# Altium PCB projct_PCB.PcbDoc
Units mil, origin at the board's own origin, x right, y up, seen from the top; angles counter-clockwise.
Board outline 2215 x 905 mil, 2 copper layers (Top Layer, Bottom Layer); 33 components, 49 nets, 162 pads, 55 vias.
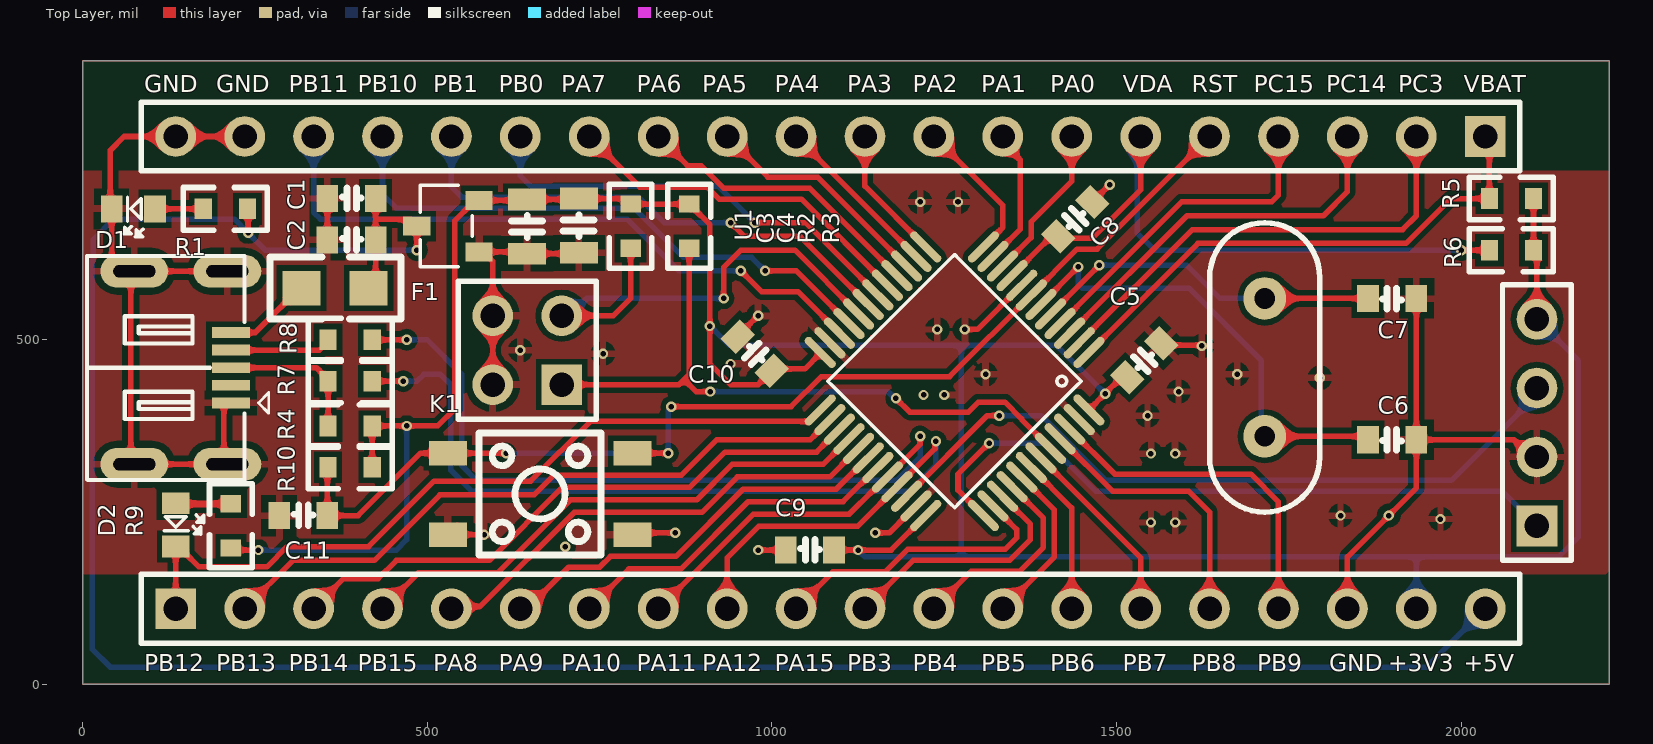
[diagram p0: Top Layer view]
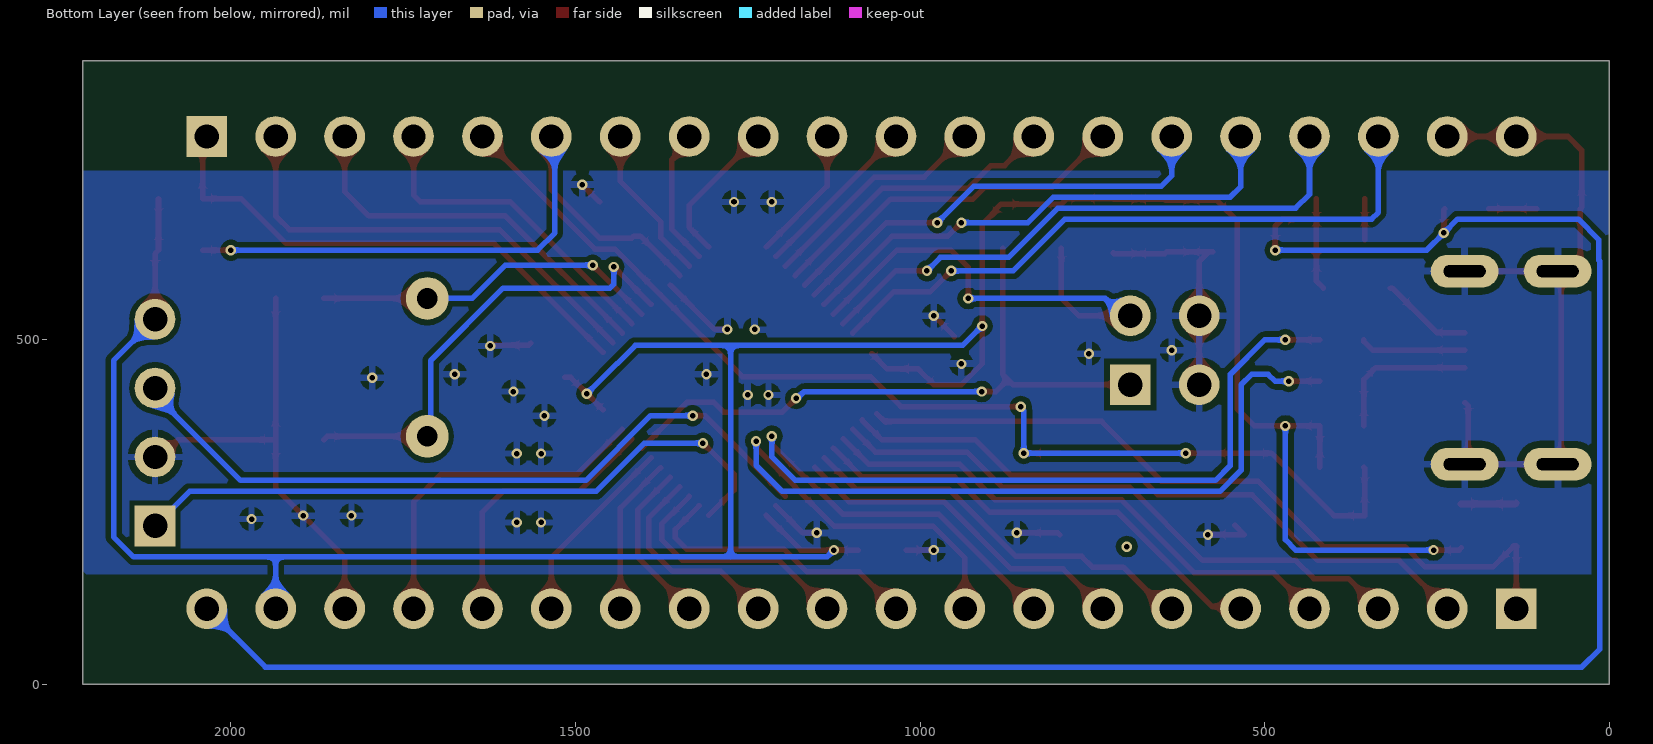
[diagram p1: Bottom Layer view, seen from below]

## Layer stack, top to bottom
Top Solder: solder mask 0.4, Solder Resist, Dk 3.5
Top Layer: signal copper 1.4
Dielectric 1: dielectric 12.6, FR-4, Dk 4.8
Bottom Layer: signal copper 1.4
Bottom Solder: solder mask 0.4, Solder Resist, Dk 3.5

## Board outline
0,0 0,905 2215,905 2215,0

## Design rules (kind name [scope] priority, off if disabled: settings)
Clearance [All] p1: gap=8 ignorepadtopadclearanceinfootprint=FALSE
PolygonConnect [All] p1: connectstyle=Relief reliefconductorwidth=10 reliefentries=4 polygonreliefangle="90 Angle" airgapwidth=10
RoutingVias [All] p1: holewidth=28 width=50 viastyle="Through Hole" minholewidth=28 minwidth=50 maxholewidth=28 maxwidth=50
SolderMaskExpansion [All] p1: expansion=4 istentingtop=FALSE
Width [All] p1: maxlimit=10 minlimit=8 preferedwidth=8 minimp=50.000000 maximp=50.000000 favimp=50.000000
30 further rules are at their usual default settings.

## Classes and differential pairs
component class project_Sheet: C1 C2 C3 C4 C5 C6 C7 C8 C9 C10 C11 D2 F1 K1 R1 R2 R3 R4 R6 R8 R10

## Components (designator, comment, footprint, x,y, rotation, side; value= is the part's Value field where it differs from the comment)
C1 "4.7uF/10V" 0603CC 355,705 r0 top
C2 "100nF/50V" 0603CC 355,645 r0 top
C3 "4.7uF/50V" 0805CC 645,625 r90 top
C4 "100nF/50V" 0805CC 720,626.26 r90 top
C5 "100nF/50V" 0603CC 1565,495 r225 top
C6 "22pF/10V" 0603CC 1935,355 r180 top
C7 "22pF/10V" 0603CC 1935,560 r180 top
C8 "100nF/50V" 0603CC 1465,700 r225 top
C9 "100nF/50V" 0603CC 1020,195 r0 top
C10 "100nF/50V" 0603CC 950.5,504.5 r315 top
C11 "100nF/50V" 0603CC 285,245 r0 top
CY1 "8MHz" HC-49S 1715,560 r270 top
D1 "LED" 0603LED 105,690 r180 top
D2 "LED" 0603LED 135,262.99 r270 top
F1 "100mA" R0805 317.48,575.03 r0 top
J1 "Header 2x2" HDR2X2 695,435 r90 top
J2 "Header 1x7" PCBComponent_1 425,63.5 r270 top
J3 "Header 1x20" HDR1X20 2035,795 r180 top
J4 "Header 1x20" HDR1X20 135,110 r0 top
J5 "Header 1x4" HDR1X4 2110,230 r90 top
K1 "SW4P" 4.5*4.5*3.8 665,275 r180 top
R1 "1K5" 0603R#1 207,690 r0 top
R2 "1K5" 0603R#1 795,665 r90 top
R3 "1K5" 0603R#1 880,665 r90 top
R4 "1K5" 0603R#1 388,375 r0 top
R5 "Comment" 0603R#2 2073,705 r0 top
R6 "0R" 0603R#1 2073,630 r180 top
R7 "10R" 0603R#1 388,440 r180 top
R8 "10R" 0603R#1 388,500 r180 top
R9 "1K5" 0603R#1 215,230 r270 top
R10 "10K" 0603R#1 388,315 r0 top
U1 "SS662K-3.3V" SOT23-JX 530,665 r90 top
U2 "STM32F103C8T6" LQFP48 1265,440 r135 top

## Footprints (in the part's own frame and the unit in brackets; to place one, negate y for a bottom-side part, rotate by r counter-clockwise, add the part's x,y. Pads: shape width x height; smd on the part's side, far side on the other; paste and mask are expansions set on the pad)
4.5*4.5*3.8 [mm]
  rect 1.4x0.9 smd: 1(-3.364,1.464) 1(3.436,1.464) 2(-3.364,-1.536) 2(3.436,-1.536)
  silkscreen extent -2.21,-2.29 2.29,2.21
0603CC [mm]
  rect 0.8x1 smd: 1(0,0) 2(1.778,0)
  silkscreen extent 0.55,-0.38 1.25,0.39
0603LED [mm]
  rect 0.8x1 smd: 1(0,0) 2(1.6,0)
  silkscreen extent 0.42,-0.43 1.15,1.02
0603R#1 [mil]
  rect 25x30 smd: 1(-32,0) 2(32,0)
  silkscreen extent -61,-31 61,31
0603R#2 [mil]
  rect 25x30 smd: 2(32,0) ""(-32,0)
  silkscreen extent -61,-31 61,31
0805CC [mm]
  rect 0.8x1.4 smd: 1(0,0) 2(2,0)
  silkscreen extent 0.6,-0.56 1.4,0.58
HC-49S [mil]
  round 62 hole 30: 1(0,0) 2(200,0)
  silkscreen extent -110,-80 310,80
HDR1X4 [mm] "Connector; Header; 4 Position"
  rect 1.5x1.5 hole 0.9: 1(0,0)
  round 1.5 hole 0.9: 2(2.54,0) 3(5.08,0) 4(7.62,0)
  silkscreen extent -1.27,-1.27 8.89,1.27
HDR1X20 [mm] "Connector; Header; 20 Position"
  rect 1.5x1.5 hole 0.9: 1(0,0)
  round 1.5 hole 0.9: 2(2.54,0) 3(5.08,0) 4(7.62,0) 5(10.16,0) 6(12.7,0) 7(15.24,0) 8(17.78,0) 9(20.32,0) 10(22.86,0) 11(25.4,0) 12(27.94,0) 13(30.48,0) 14(33.02,0) 15(35.56,0) 16(38.1,0) 17(40.64,0) 18(43.18,0) 19(45.72,0) 20(48.26,0)
  silkscreen extent -1.27,-1.27 49.53,1.27
HDR2X2 [mm] "Connector; Header; 2x2 Position"
  rect 1.5x1.5 hole 0.9: 1(0,0)
  round 1.5 hole 0.9: 2(0,2.54) 3(2.54,0) 4(2.54,2.54)
  silkscreen extent -1.27,-1.27 3.81,3.81
LQFP48 [mm]
  oval 0.3x1.5 smd: 1(-2.75,-4.25) 2(-2.25,-4.25) 3(-1.75,-4.25) 4(-1.25,-4.25) 5(-0.75,-4.25) 6(-0.25,-4.25) 7(0.25,-4.25) 8(0.75,-4.25) 9(1.25,-4.25) 10(1.75,-4.25) 11(2.25,-4.25) 12(2.75,-4.25) 25(2.75,4.25) 26(2.25,4.25) 27(1.75,4.25) 28(1.25,4.25) 29(0.75,4.25) 30(0.25,4.25) 31(-0.25,4.25) 32(-0.75,4.25) 33(-1.25,4.25) 34(-1.75,4.25) 35(-2.25,4.25) 36(-2.75,4.25)
  oval 1.5x0.3 smd: 13(4.25,-2.75) 14(4.25,-2.25) 15(4.25,-1.75) 16(4.25,-1.25) 17(4.25,-0.75) 18(4.25,-0.25) 19(4.25,0.25) 20(4.25,0.75) 21(4.25,1.25) 22(4.25,1.75) 23(4.25,2.25) 24(4.25,2.75) 37(-4.25,2.75) 38(-4.25,2.25) 39(-4.25,1.75) 40(-4.25,1.25) 41(-4.25,0.75) 42(-4.25,0.25) 43(-4.25,-0.25) 44(-4.25,-0.75) 45(-4.25,-1.25) 46(-4.25,-1.75) 47(-4.25,-2.25) 48(-4.25,-2.75)
  silkscreen extent -3.3,-3.3 3.3,3.3
PCBComponent_1 [mm]
  rect 0.4x1.4 smd: 1(-11.354,-5.334) 2(-10.706,-5.334) 3(-10.058,-5.334) 4(-9.411,-5.334) 5(-8.763,-5.334)
  oval 1.2x2.5 hole 0.45 slot 1.55 at 90 deg: 5(-13.614,-5.461) 5(-13.614,-8.89) 5(-6.502,-5.461) 5(-6.502,-8.89)
  silkscreen extent -14.17,-10.63 -5.92,-3.94, body extent -14.06,-10.51 -6.06,-4.91, height 2.8
R0805 [mm] "1/8W"
  rect 1.4x1.27 smd: 1(0,0) 2(2.477,-0.001)
  silkscreen extent -1.15,-1.14 3.67,1.14, body extent 0.04,-0.62 2.04,0.64, height 0.55
SOT23-JX [mm]
  rect 0.7x1 smd: 1(-0.95,-1.15) 2(0.95,-1.15) 3(0,1.15)
  silkscreen extent -1.5,-0.89 1.5,1.02

## Part data
C1 C2 C3 C4 C5 C6 C7 C8 C9 C10 C11: library part CAP
CY1: library part CY2P, "2pin晶振", BOM_Supplier=LCSC, catid=20, spicePre=Y
F1: library part FUSE, "保险丝"
J1: library part Header2*2, "双排连接器"
J2 J3 J4 J5: "单排连接器"
K1: "4Pin轻触按键"
R1 R2 R3 R4 R6 R7 R8 R9 R10: library part RES, "分立电阻"
U1: library part SS662K
U2: "STM32单片机"

## Via types
v1: diameter 15, hole 8, Top Layer to Bottom Layer, tented both sides, 54 vias
v2: diameter 15, hole 8, Top Layer to Bottom Layer, 1 vias

## Nets (pads, with @x,y where several pads share a name; then routed paths per layer and width w, separated by ;. In a path a pad name is that pad's centre, name@x,y a point inside that pad or via, vN(x,y) a via of type N, cw(c..) or ccw(c..) an arc to the next point about the centre after c; other vN are vias at no path point)
+3V3: C3.2 C4.2 C5.2 C9.2 C10.2 J4.19 J5.4 R2.2 R3.2 R4.2 R5.2 R6.1 R9.2 R10.2 U1.2 U2.24 U2.36 U2.48 | length 4488.6
  Top Layer w8: R9.2 218,195 v2(255,195) ; R10.2 R4.2 v1(470,375) 515,375 540,400 540,673.03 569.37,702.4 U1.2 643.66,702.4 C3.2 718.74,703.74 C4.2 787,705 R2.2 R3.2 882.5,697 891,688.5 891,686 910,667 v1(910,520) 910,465 940,435 980,435 C10.2 1002.78,457.78 1047.78,457.78 U2.24@1070,480 ; C9.2 v1(1125,195) 1173.11,195 U2.36 ; U2.48 v1(1483.5,421.87) 1507.13,445.5 C5.2 ; R5.2 R6.1 2110,625 J5.4
  Bottom Layer w8: v2(255,195) 455,195 470,210 v1(470,375) ; v1(910,520) 938.17,491.83 1275,491.83 ; v1(1125,195) 1135,185 1275,185 ; v1(1483.5,421.87) 1440.37,465 1440,465 1413.17,491.83 1275,491.83 ; J4.19 1935,185 ; J5.4 2170,470 2170,213.97 2141.03,185 1935,185 ; 1275,185 1935,185 ; 1275,185 1275,491.83
+5V: C1.2 C2.2 F1.2 J4.20 R1.2 U1.3 | length 3431
  Top Layer w8: R1.2 240,689 v1(240,655) ; F1.2 425,585 C2.2 425,675 ; C1.2 425,675 ; v1@485,630 v1(484.86,630.14) 484.72,630.28 U1.3 474.94,674.78 425.22,674.78 425,675
  Bottom Layer w8: v1(484.86,630.14) 264.86,630.14 v1(240,655) 220,675 45,675 15,645 15,615.47 13.79,614.26 13.79,51.21 40,25 1950,25 J4.20
BOOT0: J1.1 R3.1 U2.44 | length 959.8
  Top Layer w8: J1.1 865,435 872.5,442.5 ; R3.1 880,450 872.5,442.5 ; v1(910.5,425) 890,425 872.5,442.5 ; v1(1180,415) 1200,395 1285,395 1299.5,409.5 1338.08,409.5 1362.16,385.42 1362.16,384.6 U2.44
  Bottom Layer w8: v1(910.5,425) 1168.11,425 1178.11,415 v1(1180,415)
BOOT1: J1.3 R2.1 U2.20 | length 718.2
  Top Layer w8: J1.3 770,535 795,560 R2.1 ; v1(930,560) 930,605 955,630 1033.24,630 U2.20
  Bottom Layer w8: J1.3 706.41,535 731.41,560 v1(930,560)
GND: C1.1 C2.1 C3.1 C4.1 C5.1 C6.1 C7.1 C8.1 C9.1 C10.1 C11.1 D1.2 J1.2 J1.4 J2.5 J3.19 J3.20 J4.18 J5.2 K1.1 U1.1 U2.8 U2.23 U2.35 U2.47 | length 2620.5
  Top Layer w8: J2.5@205,599.5 75,599.5 J2.5@70,599.5 ; J2.5@210,408.5 208.87,408.5 205,404.63 205,319.5 75,319.5 70,319.5 J2.5@70,599.5 ; J3.19 J3.20 60,795 40,775 40,692.01 D1.2 42.01,617.63 60.14,599.5 J2.5@70,599.5 ; C2.1 C1.1 ; K1.1@543.44,231.08 529.72,217.36 v1(582.36,217.36) ; U1.1 U1.1@581.18,627.6 ; J1.2 J1.4 595,613.78 U1.1@581.18,627.6 ; C4.1 718.74,625 C3.1 642.4,627.6 U1.1@581.18,627.6 ; K1.1@797.44,217.36 800.08,220 v1(860,220) ; C10.1 950.5,505.5 v1(980,535) ; v1(980,195) C9.1 ; v1(1150,220) 1170.27,220 U2.35 ; v1(1280,515) 1298.24,515 U2.8 ; C8.1 v1(1490,725) ; C5.1 1567.78,492.22 1622.78,492.22 v1@1625,490 ; J4.18 1835,185 1935,285 C6.1 ; C7.1 C6.1 ; J5.2 2101.27,330 2076.27,355 C6.1
  other v1: 1550,235 1585,235 1970,240 1825,245 1895,245 1550,335 1585,335 1545,390 1220,420 1250,420 1590,425 1795,445 1310,450 1675,450 940,465 755,480 635,485 1623.89,491.11 1240,515 1215,700 1270,700
NetD1_1: D1.1 R1.1 | length 70
  Top Layer w8: D1.1 R1.1
NetD2_1: D2.1 R9.1 | length 80.4
  Top Layer w10: D2.1 135.99,262 R9.1
NetF1_1: F1.1 J2.1 | length 134.2
  Top Layer w8: J2.1@210,510.5 250.39,510.5 314.92,575.03 F1.1
NRST: C11.2 J3.5 K1.2 R10.1 U2.7 | length 1668.7
  Top Layer w8: R10.1 355,314 C11.2 399.69,245 490.17,335.47 529.72,335.47 v1(614.53,335.47) v1@615,335 ; K1.2@797.44,335.47 v1(849.53,335.47) v1@850,335 ; v1(853.88,403.02) 1028.02,403.02 1071.7,446.7 1257.78,446.7 U2.7 1442.78,631.7 1471.7,631.7 J3.5
  Bottom Layer w8: v1(614.53,335.47) v1(849.53,335.47) 849.53,396.78 853.88,401.12 v1(853.88,403.02)
"OSC   OUT": C6.2 CY1.2 U2.6 | length 677.4
  Top Layer w8: U2.6 1390.27,551.49 1444.33,605.54 v1(1444.33,605.67) ; CY1.2 1860,360 C6.2
  Bottom Layer w8: v1(1444.33,605.67) 1444.33,580.67 1450,575 1605,575 1710,470 1710,365 CY1.2
"OSC IN": C7.2 CY1.1 U2.5 | length 511.9
  Top Layer w8: U2.5 v1(1475,608.24) v1@1475,610 ; CY1.1 C7.2
  Bottom Layer w8: v1(1475,608.24) 1601.76,608.24 1650,560 CY1.1
PA0: J3.7 U2.10 | length 229.6
  Top Layer w8: U2.10 1376,648.44 1376,671 1435,730 J3.7
PA1: J3.8 U2.11 | length 200.7
  Top Layer w8: U2.11 1360,660.27 1360,761.27 1335,786.27 J3.8
PA2: J3.9 U2.12 | length 213.2
  Top Layer w8: J3.9 1335,695 1335,663.11 U2.12
PA3: J3.10 U2.13 | length 196.7
  Top Layer w8: J3.10 1135,723.11 U2.13
PA4: J3.11 U2.14 | length 246.4
  Top Layer w8: J3.11 1035.14,795 1209.18,620.95 U2.14
PA5: J3.12 U2.15 | length 338.3
  Top Layer w8: J3.12 994,736 1066.44,736 U2.15
PA6: J3.13 U2.16 | length 430.1
  Top Layer w8: J3.13 877.38,752.62 897.38,752.62 930,720 1054.6,720 U2.16
PA7: J3.14 U2.17 | length 522
  Top Layer w8: J3.14 808.5,721.5 905.87,721.5 923.37,704 1042.76,704 U2.17
PA8: J4.5 U2.29 | length 687
  Top Layer w8: J4.5 538.08,113.08 576.53,113.08 713.2,249.76 898.39,249.76 949.85,301.22 1084.15,301.22 U2.29@1125.65,342.72
PA9: J4.6 U2.30 | length 595
  Top Layer w8: J4.6 645,110 705,170 750,170 765.64,185.64 860.64,185.64 958.22,283.22 1093.22,283.22 U2.30@1139.18,329.18
PA10: J4.7 U2.31 | length 503.2
  Top Layer w8: J4.7 792.64,167.64 868.1,167.64 965.67,265.22 1103.18,265.22 U2.31@1153.17,315.2
PA11: J4.8 R8.1 U2.32 | length 1491.6
  Top Layer w8: R8.1 v1(470,500) ; J4.8 835.91,110 973.13,247.22 1112.22,247.22 1147.2,282.2 1147.92,282.2 1166.53,300.81 U2.32 1215,348.24 v1(1215,360)
  Bottom Layer w8: v1(470,500) 500,500 550,450 550,317.63 571.63,296 1181,296 1215,330 v1(1215,360)
PA12: J4.9 R7.1 U2.33 | length 1468.4
  Top Layer w8: R7.1 v1(465,440) ; J4.9 935,183.63 980.58,229.22 1124.22,229.22 U2.33@1181.68,286.68 ; U2.33 1236.65,342.05 1236.65,351.65 v1(1237.99,352.99)
  Bottom Layer w8: v1(465,440) 485,440 495,450 519,450 534,435 534,311 565,280 1200,280 1237.99,317.99 v1(1237.99,352.99)
PA13/SWDIO: J5.3 U2.34 | length 1063.4
  Top Layer w8: U2.34 1312.44,390 v1(1330,390)
  Bottom Layer w8: v1(1330,390) 1391,390 1485,296 1986,296 2110,420 J5.3
PA14/SWCLK: J5.1 U2.37 | length 983.4
  Top Layer w8: U2.37 1270,281.89 1270,305 v1(1315,350)
  Bottom Layer w8: v1(1315,350) 1400,350 1470,280 2060,280 J5.1
PA15: J4.10 U2.38 | length 423.3
  Top Layer w8: J4.10 1088.31,163.31 1164.06,163.31 1196.74,196 1338.37,196 1355,212.63 1355,225 1320.95,259.05 U2.38
PB0: J3.15 U2.18 | length 647.2
  Top Layer w8: v1(975,670) 1048.92,670 U2.18
  Bottom Layer w8: J3.15 635,738 650,723 922,723 v1(975,670)
PB1: J3.16 U2.19 | length 748.4
  Top Layer w8: v1(940,670) 960,650 1041.08,650 U2.19
  Bottom Layer w8: J3.16 535,722 550,707 806.63,707 843.63,670 v1(940,670)
PB3: J4.11 U2.39 | length 361.1
  Top Layer w8: J4.11 1205,180 1345,180 1375,210 1375,232.56 U2.39
PB4: J4.12 U2.40 | length 302.6
  Top Layer w8: J4.12 1289,164 1359,164 1394,199 1394,241.4 U2.40
PB5: J4.13 U2.41 | length 241.6
  Top Layer w8: J4.13 1410,185 1410,253.24 U2.41
PB6: J4.14 U2.42 | length 229
  Top Layer w8: U2.42 1435,256.08 J4.14
PB7: J4.15 U2.43 | length 278.6
  Top Layer w8: U2.43 1535,183.92 J4.15
PB8: J4.16 U2.45 | length 401
  Top Layer w8: U2.45 1494.6,280 1605,280 1635,250 J4.16
PB9: J4.17 U2.46 | length 501.6
  Top Layer w8: U2.46 1497.44,305 1695,305 1735,265 J4.17
PB10: J3.17 U2.21 | length 838.5
  Top Layer w8: v1(990,600) 1035.4,600 U2.21
  Bottom Layer w8: J3.17 435,711 455,691 800,691 871.5,619.5 970.5,619.5 v1(990,600)
PB11: J3.18 U2.22 | length 945.6
  Top Layer w8: v1(955,600) 985,570 1037.56,570 U2.22
  Bottom Layer w8: J3.18 335,685 345,675 790,675 865,600 v1(955,600)
PB12: D2.2 J4.1 U2.25 | length 1121.7
  Top Layer w8: J4.1 D2.2 ; D2.2@138.94,200 168.44,170.5 267.22,170.5 296.72,200 415,200 510,295 650,295 736.54,381.54 1051.66,381.54 U2.25@1062.55,392.42
  Top Layer w10: D2.2 D2.2@138.94,200
PB13: J4.2 U2.26 | length 963.3
  Top Layer w8: J4.2 305,180 423.28,180 518.28,275 655,275 683.76,303.76 868.76,303.76 920.22,355.22 1055.97,355.22 1084.05,383.29 U2.26
PB14: J4.3 U2.27 | length 870.8
  Top Layer w8: J4.3 378.53,153.53 428.53,153.53 455,180 590,180 695.76,285.76 880.76,285.76 932.22,337.22 1064.78,337.22 U2.27
PB15: J4.4 U2.28 | length 778.9
  Top Layer w8: J4.4 487,162 602,162 707.76,267.76 890.93,267.76 942.39,319.22 1074.22,319.22 U2.28@1111.68,356.68
PC13: J3.2 U2.2 | length 680.6
  Top Layer w8: U2.2 1445.95,495.95 1610,660 1915,660 1935,680 J3.2
PC14: J3.3 U2.3 | length 568
  Top Layer w8: U2.3 1602.44,680 1800,680 1835,715 J3.3
PC15: J3.4 U2.4 | length 479.1
  Top Layer w8: U2.4 1594.6,700 1725,700 1735,710 J3.4
"USB  DM": J2.2 R8.2 | length 153.7
  Top Layer w8: J2.2@210,485 343.5,485 356,497.5 R8.2
"USB  DP": J2.3 R4.1 R7.2 | length 220.5
  Top Layer w8: J2.3@210,459.5 339,459.5 356,442.5 R7.2 R4.1
VBAT: J3.1 R5. U2.1 | length 766.1
  Top Layer w8: U2.1 1546.15,568.04 1618.11,640 1920,640 1985,705 R5. 2041,789 J3.1
VDDA: C8.2 J3.6 R6.2 U2.9 | length 981.2
  Top Layer w8: U2.9 1405.91,650.5 C8.2 1418.29,647.72 1434.9,647.72 1465.08,647.7 1535,717.63 J3.6 ; v1(2000,630) R6.2
  Bottom Layer w8: J3.6 1530,790 1530,655 1555,630 v1(2000,630)
pads on no net: J2.4
copper on no net:
  other v1: 700,200

## Polygon pours and split planes (outlines as drawn)
GND on Bottom Layer "GND_L02_P002" (solid, remove dead copper, pour order 2): 0,0 0,905 2215,905 2215,0
GND on Bottom Layer "GND_L02_P000" (solid, remove dead copper, pour order 0): 0,0 0,905 2215,905 2215,0
GND on Top Layer "GND_L01_P003" (solid, pour order 3): 0,0 0,905 2215,905 2215,0
GND on Top Layer "GND_L01_P001" (solid, remove dead copper, pour order 1): 0,0 0,905 2215,905 2215,0

## Other copper
Multi-Layer:
  pour cut-out: 0,160 0,0 2215,0 2215,160
  pour cut-out: 2215,745 2215,905 0,905 0,745

## Silkscreen, mask and mechanical layers (free items; w line width, h text height)
Top Overlay:
  text "GND" at 89,859 h25
  text "GND" at 194,859 h25
  text "PB11" at 299,859 h25
  text "PB10" at 399,859 h25
  text "PB1" at 509,859 h25
  text "PB0" at 604,859 h25
  text "PA7" at 694,859 h25
  text "PA6" at 804,859 h25
  text "PA5" at 899,859 h25
  text "PA4" at 1004,859 h25
  text "PA3" at 1109,859 h25
  text "PA2" at 1204,859 h25
  text "PA1" at 1304,859 h25
  text "PA0" at 1404,859 h25
  text "VDA" at 1509,859 h25
  text "RST" at 1609,859 h25
  text "PC15" at 1699,859 h25
  text "PC14" at 1804,859 h25
  text "PC3" at 1909,859 h25
  text "VBAT" at 2004,859 h25
  text "U1" at 971,644 h25 r90
  text "PB12" at 89,19 h25
  text "PB13" at 194,19 h25
  text "PB14" at 299,19 h25
  text "PB15" at 399,19 h25
  text "PA8" at 509,19 h25
  text "PA9" at 604,19 h25
  text "PA10" at 694,19 h25
  text "PA11" at 804,19 h25
  text "PA12" at 899,19 h25
  text "PA15" at 1004,19 h25
  text "PB3" at 1109,19 h25
  text "PB4" at 1204,19 h25
  text "PB5" at 1304,19 h25
  text "PB6" at 1404,19 h25
  text "PB7" at 1509,19 h25
  text "PB8" at 1609,19 h25
  text "PB9" at 1704,19 h25
  text "GND" at 1809,19 h25
  text "+3V3" at 1894,19 h25
  text "+5V" at 2004,19 h25
Mechanical 1:
  the board outline again, w10